# EAGLE board Parachute_V1.5 (EAGLE 9.6.2)

Size 172.72 x 106.41 mm. Coordinates in mm from the lower left corner, seen from the top.
Outline: 168.83,106.41 5.28,106.17 arc90 0,100.89 0,4.33 arc90 4.33,0 166.75,0.24 arc90 172.72,6.22 172.72,102.53 arc90 168.83,106.41
Outline: circle at 163.83,19.04 radius 1.8
Outline: circle at 163.83,27.93 radius 1.8
Outline: circle at 163.83,38.09 radius 1.8
Outline: circle at 163.83,46.98 radius 1.8
Outline: circle at 163.83,57.14 radius 1.8
Outline: circle at 163.83,66.03 radius 1.8
Outline: circle at 163.83,76.19 radius 1.8
Outline: circle at 163.83,85.08 radius 1.8
Copper layers (1*16): Top 0.035559375mm / dielectric 1.6mm / Bottom 0.035559375mm
Design rules "oshpark-2layer (1) *": minimum track width 10mil, minimum drill 10mil, track to track 10mil, track to pad 10mil, pad to pad 8mil, via to via 10mil, smd to smd 8mil, copper to edge 15mil, drill to drill 6mil, minimum pad ring 5mil, minimum via ring 5mil, stop-mask expansion 2.5mil, vias tented up to drill 25mil, thermal gap 10mil
Net classes: 1 High Power: width 0.406 mm, drill 0.483 mm

## Footprints (pad centres in the part's own frame; a part is rotated, then mirrored left to right if it is on the bottom)
M0805 = smd 1.3 x 1.6: 1 -0.95,0; 2 0.95,0
MSTBA3 = drill 1.397 long: 1 -5.08,5.08; 2 0,5.08; 3 5.08,5.08
MSTBA4 = drill 1.397 long: 1 -7.62,5.08; 2 -2.54,5.08; 3 2.54,5.08; 4 7.62,5.08
1X08-CLEANBIG = drill 1.016 pad 1.778 octagon: 1 -8.89,0; 2 -6.35,0; 3 -3.81,0; 4 -1.27,0; 5 1.27,0; 6 3.81,0; 7 6.35,0; 8 8.89,0
1X06-BIG = drill 1.016 pad 1.778 octagon: 1 -6.35,0; 2 -3.81,0; 3 -1.27,0; 4 1.27,0; 5 3.81,0; 6 6.35,0
1X03_NO_SILK = drill 1.016 pad 1.88: 1 0,0; 2 2.54,0; 3 5.08,0
1X02_NO_SILK = drill 1.016 pad 1.88: 1 0,0; 2 2.54,0
1X06 = drill 1.016 pad 1.88: 1 0,0; 2 2.54,0; 3 5.08,0; 4 7.62,0; 5 10.16,0; 6 12.7,0
SO-8_POWER_PAK = smd 0.762 x 2.032: D1 -3.423,2.437; D2 -2.153,2.437; D3 -0.883,2.437; D4 0.387,2.437; G 0.387,-3.532 | smd 3.81 x 3.048: D5 -1.518,0.278 | smd 3.302 x 2.032: S -2.153,-3.532
STANDOFF_ELECTRICAL_5_32 = drill 3.969 pad 7.62: P1 0,0
P2-38-17 = drill 1.702 pad 2.121 long: TP-1 -1.905,0; TP-2 1.905,0
ADAFRUIT_LENOARDO = drill 1.016 pad 1.88: 3V -10.16,-21.59; 5V -10.16,8.89; A0 -10.16,1.27; A1 -10.16,-1.27; A2 -10.16,-3.81; A3 -10.16,-6.35; A4 -10.16,-8.89; A5 -10.16,-11.43; AREF -10.16,6.35; D4 2.54,-21.59; D5 5.08,-11.43; D6 0,-21.59; D7 5.08,-8.89; D8 -2.54,-21.59; D9 5.08,-6.35; D10 5.08,-3.81; D11 5.08,-1.27; D12 5.08,1.27; D13 5.08,3.81; EN -7.62,-21.59; GND@0 -10.16,3.81; GND@1 -5.08,-21.59; GND@2 5.08,8.89; MISO -10.16,-19.05; MOSI -10.16,-16.51; RES -10.16,11.43; RX 5.08,-21.59; SCK -10.16,-13.97; SCL 5.08,-13.97; SDA 5.08,-16.51; TX 5.08,-19.05; USB 5.08,6.35; VIN 5.08,11.43
1X10-BIG = drill 1.016 pad 1.778 octagon: 1 -11.43,0; 2 -8.89,0; 3 -6.35,0; 4 -3.81,0; 5 -1.27,0; 6 1.27,0; 7 3.81,0; 8 6.35,0; 9 8.89,0; 10 11.43,0
MSTBA8 = drill 1.397 long: 1 -17.78,5.08; 2 -12.7,5.08; 3 -7.62,5.08; 4 -2.54,5.08; 5 2.54,5.08; 6 7.62,5.08; 7 12.7,5.08; 8 17.78,5.08

## Placement (x,y rotation side)
10K  [M0805]  45.72,54.6 270 top
10K1  [M0805]  38.1,54.6 270 top
12V_IN  MSTBA3  [MSTBA3]  31.75,6.34 0 top
FAN_POWER  MSTBA4  [MSTBA4]  106.68,101.21 180 top
JP1  [1X08-CLEANBIG]  120.27,76.07 180 top
JP2  [1X08-CLEANBIG]  102.49,27.81 180 top
JP3  [1X06-BIG]  122.81,27.81 0 top
JP9  [1X03_NO_SILK]  103.76,32.51 0 top
JP10  [1X03_NO_SILK]  92.33,69.84 0 top
JP11  M021X02_NO_SILK  [1X02_NO_SILK]  126.62,69.84 0 top
JP12  Male  [1X06]  116.46,32.51 0 top
Q1  MOSFET-NCH  [SO-8_POWER_PAK]  49.53,67.3 0 top
Q2  MOSFET-NCH  [SO-8_POWER_PAK]  36.83,67.3 0 top
S1  STANDOFF_ELECTRICAL5-32  [STANDOFF_ELECTRICAL_5_32]  15.49,93.21 0 top
S2  STANDOFF_ELECTRICAL5-32  [STANDOFF_ELECTRICAL_5_32]  86.36,93.21 0 top
S3  STANDOFF_ELECTRICAL5-32  [STANDOFF_ELECTRICAL_5_32]  157.23,12.95 0 top
S4  STANDOFF_ELECTRICAL5-32  [STANDOFF_ELECTRICAL_5_32]  157.23,93.21 0 top
S6  STANDOFF_ELECTRICAL5-32  [STANDOFF_ELECTRICAL_5_32]  86.36,12.95 0 top
S8  STANDOFF_ELECTRICAL5-32  [STANDOFF_ELECTRICAL_5_32]  15.49,12.95 0 top
TP1  PTR2  [P2-38-17]  27.94,27.93 0 top
TP2  PTR2  [P2-38-17]  35.56,27.93 0 top
U1  ITSYBITSY_5V  [ADAFRUIT_LENOARDO]  60.96,16.5 180 top
U$1  PINHD-1X10  [1X10-BIG]  96.14,76.07 180 top
X1  MSTBA8  [MSTBA8]  49.53,100.32 180 top

## Library data of the parts
10K 10K1 JP1-JP3 U$1 = adafruit
12V_IN = con-phoenix-508; MF: FARNELL; MPN: 1757255; OC_FARNELL: 3705183; OC_NEWARK: 71C4162
FAN_POWER = th_libraries; MF: FARNELL; MPN: 1757268; OC_FARNELL: 3705195; OC_NEWARK: 71C4163
JP9-JP12 = SparkFun-Connectors
Q1 Q2 U1 = th_ds_libraries
S1-S4 S6 S8 = th_libraries
TP1 TP2 = testpad
X1 = con-phoenix-508; MF: FARNELL; MPN: 1757307; OC_FARNELL: 3705225; OC_NEWARK: 71C4166

## Nets
5V [High Power]: JP2.4 JP9.1 TP2.TP-1 U1.5V
12V [High Power]: 12V_IN.1 TP2.TP-2 X1.1 X1.5
A3: JP3.4 JP12.3 U1.A3
GND [High Power]: 12V_IN.3 FAN_POWER.4 JP2.2 JP2.3 JP9.2 JP9.3 JP10.3 Q1.S Q2.S S1.P1 S2.P1 S3.P1 S4.P1 S6.P1 S8.P1 TP1.TP-1 TP1.TP-2 U1.GND@2 U$1.7 X1.2 X1.6
N$1: Q2.D1 X1.7
N$2: Q1.D1 X1.3
N$3: JP1.1 JP11.2 U1.RX
N$4: U1.D8 U$1.1
N$5: JP1.2 JP11.1 U1.TX
N$6: U1.AREF U$1.8
N$7: 10K.1 Q1.G
N$8: JP3.1 JP12.6 U1.A0
N$9: 10K1.1 Q2.G
N$10: JP3.2 JP12.5 U1.A1
N$11: JP3.3 JP12.4 U1.A2
N$13: JP3.5 JP12.2 U1.A4
N$14: JP3.6 JP12.1 U1.A5
N$15: JP10.2 U1.D12 U$1.6
N$16: JP1.3 U1.SDA U$1.9
N$17: JP1.4 U1.SCL U$1.10
N$18: JP10.1 U1.D13 U$1.5
N$19: JP1.6 U1.D5 X1.8
N$20: JP1.7 U1.D6
N$21: JP1.8 U1.D7 X1.4
N$22: JP1.5 U1.D4
N$23: JP2.6 U1.RES
N$25: JP2.5 U1.3V
N$27: FAN_POWER.2 U1.D9 U$1.2
N$28: 10K1.2 U1.D10 U$1.3
N$29: 10K.2 U1.D11 U$1.4
N$31: JP2.1 U1.VIN

## Tracks (layer width: path | path; a pad name or v marks a point on that pad's centre or on a via)
5V  (3 unrouted)
12V  (3 unrouted)
A3  (2 unrouted)
GND  (20 unrouted)
N$1  (1 unrouted)
N$2  (1 unrouted)
N$3  (2 unrouted)
N$4  (1 unrouted)
N$5  (2 unrouted)
N$6  (1 unrouted)
N$7  (1 unrouted)
N$8  (2 unrouted)
N$9  (1 unrouted)
N$10  (2 unrouted)
N$11  (2 unrouted)
N$13  (2 unrouted)
N$14  (2 unrouted)
N$15  (2 unrouted)
N$16  (2 unrouted)
N$17  (2 unrouted)
N$18  (2 unrouted)
N$19  (2 unrouted)
N$20  (1 unrouted)
N$21  (2 unrouted)
N$22  (1 unrouted)
N$23  (1 unrouted)
N$25  (1 unrouted)
N$27  (2 unrouted)
N$28  (2 unrouted)
N$29  (2 unrouted)
N$31  (1 unrouted)

## Text on the board
tPlace: SCL | DIGITAL 2 | DIGITAL 1 | -> A0 / -> A1 / -> A4 / -> A5 | ANALOG 2 | IOREF | RST | 3.3V | 5V | GND | GND | VIN | A0 | A1 | A2 | A3 | A4 | A5 | ANALOG 1 | Adafruit Itsybitsy / 32u4
tNames: Start_BTN | Start_PWM | GND | 12v | Stop_BTN | Stop_PWM | GND | 12v | GND | FAN_Trigger | SDA | AREF | GND | D13 | D12 | D11 | D10 | D9 | D8 | D7 | D6 | D5 | D4 | D3 | D2 | D1 | D0 | Start_PWM | Stop_PWM | DIGITAL 1 / MUX ADDR 10 / IO0 -> D2 / IO1 -> D3/A4 / IO2 -> D4/A5 / IO3 -> D5 | DIGITAL 2 / MUX ADDR 11 / IO0 -> D6 / IO1 -> D7/A4 / IO2 -> D8/A5 / IO3 -> D9 | 10k OHM | -> A2 / -> A3 / -> A4 / -> A5 | ANALOG 1 / MUX ADDR 00 / 0-5V / +/-10V / V_RES / IDEN | ANALOG 2 / MUX ADDR 01 / 0-5V / +/-10V / V_RES / IDEN | GND | GND | 5v | 12v | DOT: Kites / V1.5 / 7/26/2022 / Aaron De Lanty | OMSI | 12v | GND